# Altium PCB PCB1.PcbDoc
Units mm, origin at the board's own origin, x right, y up, seen from the top; angles counter-clockwise.
Board outline 110 x 70 mm, 2 copper layers (Top Layer, Bottom Layer); 15 components, 16 nets, 76 pads, 24 vias.
Unrouted connection lines stored in the file: 1.
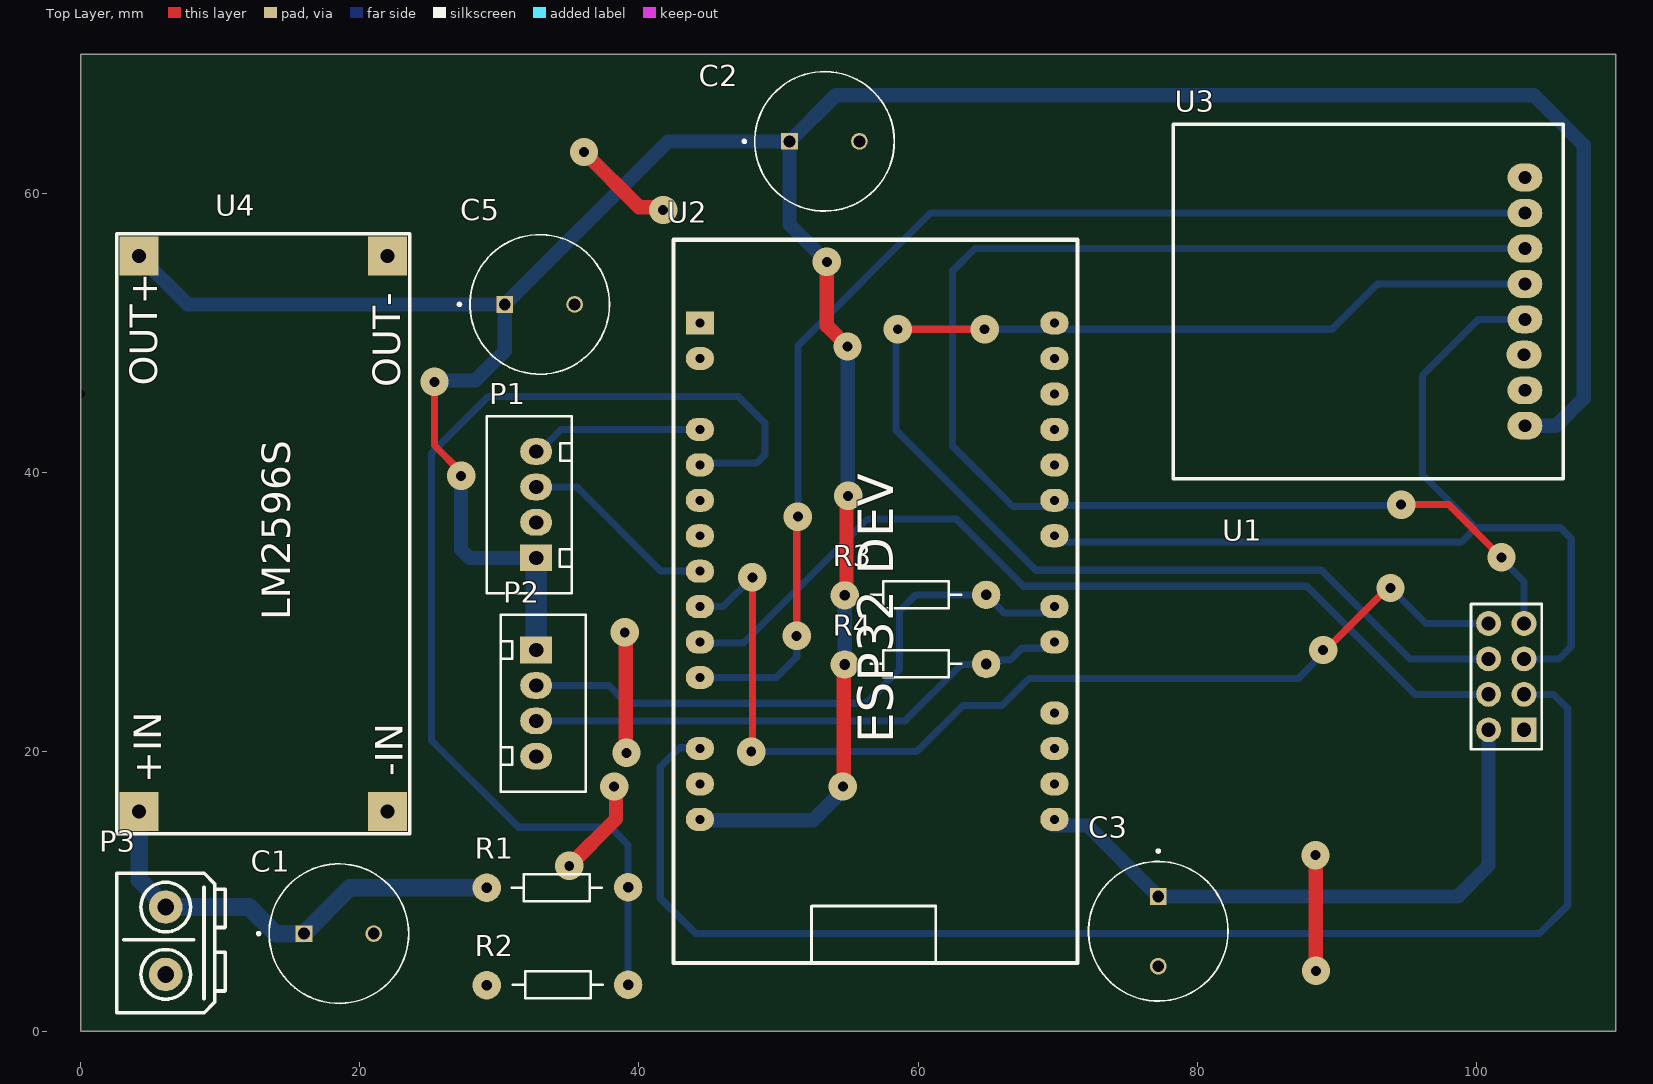
[diagram p0: Top Layer view]
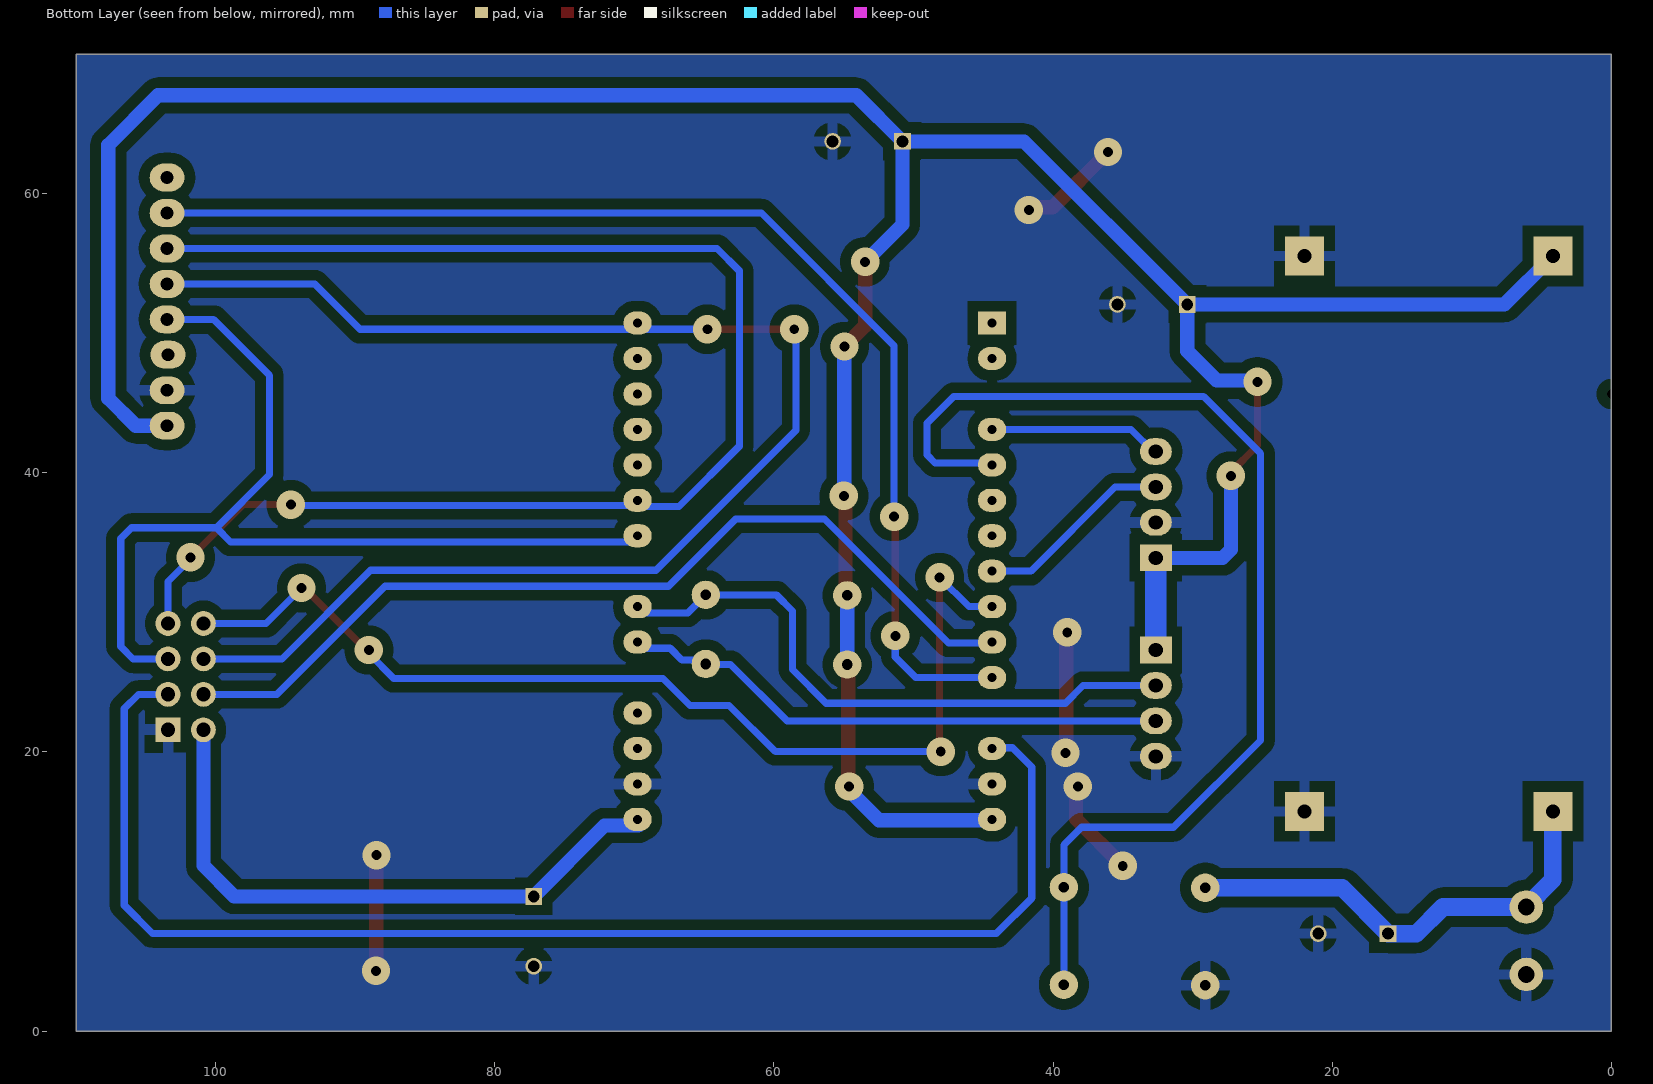
[diagram p1: Bottom Layer view, seen from below]

## Layer stack, top to bottom
Top Solder: solder mask 0.0102, Solder Resist, Dk 3.5
Top Layer: signal copper 0.0356
Dielectric 1: dielectric 0.32, FR-4, Dk 4.8
Bottom Layer: signal copper 0.0356
Bottom Solder: solder mask 0.0102, Solder Resist, Dk 3.5

## Board outline
0,0 0,70 110,70 110,0

## Design rules (kind name [scope] priority, off if disabled: settings)
Clearance [All] p1: gap=0.254 ignorepadtopadclearanceinfootprint=FALSE except(0: Arc-Hole Track-Hole SMDPad-Hole THPad-Hole Via-Hole Fill-Hole Poly-Hole Region-Hole Text-Hole; 0.762: Arc-Fill Arc-Poly Arc-Region Track-Fill Track-Poly Track-Region SMDPad-Fill SMDPad-Poly SMDPad-Region THPad-Fill THPad-Poly THPad-Region Via-Fill Via-Poly Via-Region Fill-Fill Fill-Poly Fill-Region Poly-Poly Poly-Region Region-Region)
PlaneClearance [All] p1: clearance=0.762
PlaneConnect [All] p1: planeconnectstyle=Relief reliefexpansion=0.762 reliefentries=4 reliefconductorwidth=0.762 reliefairgap=0.762
PolygonConnect [All] p1: connectstyle=Relief reliefconductorwidth=0.762 reliefentries=4 polygonreliefangle="90 Angle" airgapwidth=0.762
RoutingVias [All] p1: holewidth=0.711 width=1.27 viastyle="Through Hole" minholewidth=0.711 minwidth=1.27 maxholewidth=0.711 maxwidth=1.27
SolderMaskExpansion [All] p1: expansion=0.102 istentingtop=FALSE
Width [All] p1: maxlimit=1.524 minlimit=0.508 preferedwidth=1.016 minimp=50.000000 maximp=50.000000 favimp=50.000000
28 further rules are at their usual default settings.

## Components (designator, comment, footprint, x,y, rotation, side; value= is the part's Value field where it differs from the comment)
C1 "220uF/25V" CAP-ALUM-10x12.5 18.502,6.985 r0 top
C2 "220uF/25V" CAP-ALUM-10x12.5 53.3,63.754 r0 top
C3 "220uF/25V" CAP-ALUM-10x12.5 77.216,7.152 r270 top
C5 "220uF/25V" CAP-ALUM-10x12.5 32.893,52.07 r0 top
P1 "Soil Moisture Sensor" B4B-XH-A 32.639,33.909 r90 top value=B4B-XH-A
P2 "GPS" B4B-XH-A 32.639,27.305 r270 top value=B4B-XH-A
P3 "Domino 2" Domino-2 6.096,6.477 r0 top
R1 "100K" R1/4W-H1 34.163,10.287 r180 top
R2 "24K" R1/4W-H1 34.163,3.302 r0 top
R3 "100K" R1/4W-H1 59.817,31.242 r0 top
R4 "100K" R1/4W-H1 59.817,26.289 r0 top
U1 "Lora_SX1278" Module-LORA-SX1278 103.424,21.59 r90 top
U2 "ESP32_30P" Kit-ESP32-30P 57.837,27.62 r0 top
U3 "MAX31865" MODULE-MAX31865 95.123,52.07 r90 top
U4 "LM2596S" Module-LM2596S 13.091,35.648 r90 top

## Footprints (in the part's own frame and the unit in brackets; to place one, negate y for a bottom-side part, rotate by r counter-clockwise, add the part's x,y. Pads: shape width x height; smd on the part's side, far side on the other; paste and mask are expansions set on the pad)
B4B-XH-A [mil] "B4B-XH-A"
  rect 75x90 hole 40: 1(0,0)
  oval 75x90 hole 40: 2(100,0) 3(200,0) 4(300,0)
  silkscreen extent -100,-100 400,140, body extent -94,-93 394,133, height 271
CAP-ALUM-10x12.5 [mm] "Capacitor Aluminum 10mmx12.5mm"
  rect 1.2x1.2 hole 0.85: 1(-2.5,0)
  round 1.2 hole 0.85: 2(2.5,0)
  silkscreen extent -5.85,-5 5,5, body extent -5,-5 5,5, height 12.5
Domino-2 [mil] "Domino-2"
  round 94.5 hole 47.2 paste-99999 mask+2: 1(0,-95) 2(0,95)
  silkscreen extent -138,-203 168,190, body extent -197,-195 197,221, height 551
Kit-ESP32-30P [mil] "Kit ESP32 30P"
  rect 80x65 hole 25.2: 1(-530,910)
  oval 80x65 hole 25.2: 2(-530,810) 4(-530,610) 5(-530,510) 6(-530,410) 7(-530,310) 8(-530,210) 9(-530,110) 10(-530,10) 11(-530,-90) 13(-530,-290) 14(-530,-390) 15(-530,-490) 16(470,-490) 17(470,-390) 18(470,-290) 19(470,-190) 21(470,10) 22(470,110) 24(470,310) 25(470,410) 26(470,510) 27(470,610) 28(470,710) 29(470,810) 30(470,910)
  round 0 hole 25.2: 3(-2277.06,710)
  round 0 all layers, no hole: 12(-2277.06,-190) 20(-2275,-90) 23(-2275,210)
  silkscreen extent -605,-895 535,1145, body extent -596,-880 526,1125, height 473
Module-LM2596S [mm] "Module LM2596S"
  rect 2.799x2.799 hole 1 paste-2539.97 mask+0.102: 1(-19.9,8.9) 2(-19.9,-8.9) 3(19.9,8.9) 4(19.9,-8.9)
  silkscreen extent -21.5,-10.5 21.5,10.5, body extent -21.6,-10.63 21.6,10.63, height 13.35
Module-LORA-SX1278 [mil] "Module Lora SX1278 RA-02 SPI"
  rect 70x70 hole 40.16: 1(0,0)
  round 70 hole 40.16: 2(100,0) 3(200,0) 4(300,0) 5(0,100) 6(100,100) 7(200,100) 8(300,100)
  silkscreen extent -55,-50 355,150, body extent -204,-50 504,861, height 497
MODULE-MAX31865 [mm] "MODULE-MAX31865"
  oval 2x2.5 hole 0.914 paste+0.102 mask+0.102: 1(-8.692,-8.361) 2(-6.152,-8.361) 3(-3.602,-8.301) 4(-1.072,-8.361) 5(1.468,-8.361) 6(4.008,-8.361) 7(6.548,-8.361) 8(9.088,-8.361)
  silkscreen extent -12.5,-11.1 12.9,16.84, body extent -12.45,-11.2 12.95,16.79, height 12.8
R1/4W-H1 [mil] "R 1/4W Horizontal, 2 Pin, 350mil"
  round 80 hole 30: 1(-199.5,-0.75) 2(199.5,0.75)
  silkscreen extent -126,-37 128,39, body extent -211,-51 211,51, height 106

## Part data
C1 C2 C3 C5: library part EEUTA1E221, "Capacitor Aluminum 220uF 20% 25V Radial", MPN=CLA4514, Category=CAPACITOR, MFR_URL=http://linhkienchatluong.vn/tu-hoa-chat-luong-cao/tu-hoa-63v-47uf-nipponlelon-8x11mm_sp977_ct6500.aspx, PinCount=2, Solder=WAVE
P1 P2: library part B4B-XH-A, "Connector Header Through Hole 4 position 0.098\" (2.50mm)"
P3: library part Domino-2
R1 R2 R3 R4: library part RES-1/4W, "Resistor 1/4W Through Hole"
U1: library part Module-Lora-SX1278-SPI, "Module Lora SX1278 RA02 SPI"
U2: library part Kit_ESP32_30P, "Kit ESP32 30P"
U3: library part Module-MAX31865, "Module Max31865"
U4: library part Module-LM2596S, "Module LM2596S"

## Via types
v1: diameter 2.032, hole 0.711, Top Layer to Bottom Layer, 24 vias

## Nets (pads, with @x,y where several pads share a name; then routed paths per layer and width w, separated by ;. In a path a pad name is that pad's centre, name@x,y a point inside that pad or via, vN(x,y) a via of type N, cw(c..) or ccw(c..) an arc to the next point about the centre after c; other vN are vias at no path point)
A0: P1.4 U2.4 | length 12.4
  Bottom Layer w0.508: P1.4 32.829,41.529 34.414,43.114 U2.4
ADC: R1.1 R2.2 U2.5 | length 81.4
  Bottom Layer w0.508: R2.2 R1.1 39.23,13.348 37.973,14.605 31.369,14.605 25.146,20.828 25.146,41.402 29.21,45.466 47.117,45.466 49.022,43.561 49.022,41.275 48.455,40.708 44.509,40.708 U2.5
D0: P1.3 U2.8 | length 14.2
  Bottom Layer w0.508: P1.3 35.56,38.989 41.595,32.954 U2.8
DC3V3: C3.1 U1.5 U2.16 | length 43.9
  Bottom Layer w1.016: U2.16@69.723,14.732 72.136,14.732 C3.1 98.679,9.652 100.884,11.857 U1.5
DC5V: C2.1 C5.1 P1.1 P2.1 R3.1 R4.1 U2.15 U3.1 U4.3 | length 229.6
  Top Layer w0.508: v1(25.357,46.516) 25.357,41.953 v1@27.305,40.005
  Top Layer w1.016: v1(53.467,55.118) 53.467,50.546 v1@54.991,49.022 ; v1(54.61,17.526) 54.68,17.596 54.68,26.2 R4.1 ; R3.1 54.87,31.344 54.87,38.233 v1(54.991,38.354)
  Bottom Layer w1.016: U4.3 7.669,52.07 C5.1 ; v1@25.4,46.609 28.274,46.609 30.393,48.728 C5.1 ; v1(27.262,39.785) 27.262,34.504 27.857,33.909 P1.1 ; U2.15 44.436,15.113 52.472,15.113 54.61,17.251 v1(54.61,17.526) ; v1(53.467,55.118) 50.8,57.785 C2.1 ; R4.1@54.621,26.141 R4.1 R3.1 ; v1(54.948,49.056) 54.97,49.035 54.97,38.375 v1(54.991,38.354) ; U3.1 105.735,43.378 107.696,45.339 107.696,63.5 104.14,67.056 54.102,67.056 C2.1 ; C5.1 42.077,63.754 C2.1
  Bottom Layer w1.524: P2.1 P1.1
GND: C1.2 C2.2 C3.2 C5.2 P1.2 P2.4 P3.1 R2.1 U1.1 U2.14 U2.17 U3.2 U4.2 U4.4 | length 31.5
  Top Layer w1.016: v1(35.009,11.845) 38.354,15.19 38.354,17.399 v1(38.227,17.526) ; v1(36.068,62.992) 40.03,59.03 41.546,59.03 v1(41.74,58.835) ; v1(38.989,28.575) 39.052,28.511 39.052,20.002 v1(39.116,19.939) ; v1(88.476,12.607) 88.498,12.586 88.498,4.339 v1(88.519,4.318)
LORA_DIO0: U1.8 U2.9 | length 76.1
  Top Layer w0.508: v1@48.133,19.939 v1(48.133,32.512) ; v1(89.027,27.305) 89.218,27.305 93.662,31.75 v1(93.853,31.75)
  Bottom Layer w0.508: U2.9 46.035,30.414 v1(48.133,32.512) ; v1(48.048,20.028) 59.906,20.028 63.215,23.337 66.009,23.337 67.945,25.273 87.249,25.273 89.027,27.051 v1(89.027,27.305) ; v1(93.853,31.75) 96.393,29.21 U1.8
LORA_NSS: U1.6 U2.10 | length 65.4
  Bottom Layer w0.508: U2.10 44.436,27.813 47.498,27.813 56.388,36.703 62.738,36.703 67.564,31.877 87.884,31.877 95.631,24.13 U1.6
LORA_RST: U1.2 U2.13 | length 97.4
  Bottom Layer w0.508: U2.13 44.327,20.302 42.908,20.302 41.529,18.923 41.529,9.525 44.069,6.985 104.521,6.985 106.553,9.017 106.553,23.114 105.537,24.13 U1.2
MAX_CS: U2.11 U3.7 | length 86
  Top Layer w0.508: v1(51.308,28.321) v1@51.308,36.957
  Bottom Layer w0.508: U2.11 49.845,25.334 51.308,26.797 v1(51.308,28.321) ; v1(51.392,36.864) 51.392,49.106 60.904,58.618 U3.7
RX2: P2.3 R4.2 U2.21 | length 39.2
  Bottom Layer w0.508: P2.3 59.055,22.225 63.106,26.276 64.853,26.276 R4.2 65.176,26.6 66.605,26.6 67.437,27.432 U2.21@69.723,27.432
SPI_MISO: U1.4 U2.25 U3.6 | length 102.4
  Top Layer w0.508: v1(94.615,37.719) 98.036,37.719 v1(101.811,33.943)
  Bottom Layer w0.508: v1(94.615,37.719) 94.551,37.655 69.787,37.655 69.723,37.592 66.802,37.592 62.484,41.91 62.484,54.483 64.079,56.078 U3.6 ; v1@101.727,33.909 103.424,32.212 U1.4
SPI_MOSI: U1.7 U2.30 U3.5 | length 102.8
  Top Layer w0.508: v1(58.547,50.292) v1(64.77,50.292)
  Bottom Layer w0.508: v1(58.547,50.292) 58.42,50.165 58.42,43.053 68.453,33.02 88.9,33.02 95.25,26.67 U1.7 ; v1(64.77,50.292) 69.723,50.292 89.662,50.292 92.908,53.538 U3.5
SPI_SCK: U1.3 U2.24 U3.4 | length 70.8
  Bottom Layer w0.508: U2.24@69.723,35.052 98.933,35.052 99.949,36.068 ; U1.3 105.918,26.67 106.807,27.559 106.807,35.306 106.045,36.068 99.949,36.068 ; U3.4 100.147,50.998 96.139,46.99 96.139,39.878 99.949,36.068
TX2: P2.2 R3.2 U2.22 | length 43.8
  Bottom Layer w0.508: P2.2 37.846,24.765 39.116,23.495 56.261,23.495 58.674,25.908 58.674,30.099 59.836,31.261 R3.2 66.173,29.972 U2.22@69.723,29.972
VCC: C1.1 P3.2 R1.2 U4.1 | length 32.8
  Bottom Layer w1.016: P3.2 P3.2@6.096,8.933
  Bottom Layer w1.27: U4.1 4.191,10.838 P3.2@6.096,8.933 ; P3.2 12.065,8.89 13.97,6.985 C1.1 19.285,10.268 R1.2
pads on no net: U2.1 U2.2 U2.3 U2.6 U2.7 U2.12 U2.18 U2.19 U2.20 U2.23 U2.26 U2.27 U2.28 U2.29 U3.3 U3.8

## Polygon pours and split planes (outlines as drawn)
GND on Bottom Layer "GND_L02_P000" (solid, pour order 0): 0,0 0.01,0.01 109.997,0.01 109.997,69.975 109.995,69.977 0,69.977

## Silkscreen, mask and mechanical layers (free items; w line width, h text height)
Mechanical 1:
  the board outline again, w0.5

## Text inside footprints (layer, text, board x,y; h text height)
U2: Top Overlay "ESP32 DEV" at 58.218,20.635 h2.54 r90
U4: Top Overlay "OUT+" at 5.481,46.248 h2 r90; Top Overlay "OUT-" at 22.883,46.147 h2 r90; Top Overlay "+IN" at 5.781,17.748 h2 r90; Top Overlay "-IN" at 23.081,18.248 h2 r90